# EAGLE board shematic (EAGLE 9.7.0)

Size 203.93 x 59.69 mm. Coordinates in mm from the lower left corner, seen from the top.
Outline: 0,0 203.93,0 203.93,59.69 0,59.69 0,0
Copper layers (1*16): Top 0.035mm / dielectric 1.5mm / Bottom 0.035mm
Design rules "default": minimum track width 6mil, minimum drill 0.35mm, track to track 6mil, track to pad 6mil, pad to pad 6mil, via to via 6mil, smd to smd 6mil, copper to edge 40mil, drill to drill 6mil, minimum pad ring 10mil, minimum via ring 8mil, stop-mask expansion 4mil, vias tented up to drill 0mil, thermal gap 10mil

## Footprints (pad centres in the part's own frame; a part is rotated, then mirrored left to right if it is on the bottom)
28015 = drill 1.016 long: 1 -2.54,0; 2 0,0; 3 2.54,0
SWITCH-MOMENTARY-PTH-6.5MM = drill 1.016 pad 1.88: 1 -3.251,2.261; 2 3.251,2.261; 3 -3.251,-2.261; 4 3.251,-2.261
ARDUINO-UNO-R3-SHIELD = drill 1.016 pad 1.88: 3.3V 24.13,-2.54; 5V 24.13,0; A0 24.13,12.7; A1 24.13,15.24; A2 24.13,17.78; A3 24.13,20.32; A4 24.13,22.86; A5 24.13,25.4; AREF -24.13,-13.97; D2 -24.13,20.32; D3 -24.13,17.78; D4 -24.13,15.24; D5 -24.13,12.7; D6 -24.13,10.16; D7 -24.13,7.62; D8 -24.13,3.81; D9 -24.13,1.27; D10 -24.13,-1.27; D11 -24.13,-3.81; D12 -24.13,-6.35; D13 -24.13,-8.89; GND@0 24.13,2.54; GND@1 24.13,5.08; GND@2 -24.13,-11.43; IOREF 24.13,-7.62; NC 24.13,-10.16; RES 24.13,-5.08; RX -24.13,25.4; SCL -24.13,-19.05; SDA -24.13,-16.51; TX -24.13,22.86; VIN 24.13,7.62
7SEG-X4-I2C = drill 1.016 long: P$1 -3.81,0; P$2 -1.27,0; P$3 1.27,0; P$4 3.81,0

## Placement (x,y rotation side)
PING1  DISTANCE-SENSOR-3PIN  [28015]  177.9,41.74 0 top
S1  SWITCH_MOMENTARY  [SWITCH-MOMENTARY-PTH-6.5MM]  165.2,30.31 90 top
U1  ARDUINO-UNO-R3-SHIELD  [ARDUINO-UNO-R3-SHIELD]  47.88,29.84 270 top
U2  RED  [7SEG-X4-I2C]  125.83,39.2 0 top

## Library data of the parts
PING1 S1 U1 U2 = Tinkercad

## Nets
U1_5V: PING1.2 U1.5V U2.P$1
U1_A4: U1.A4 U2.P$3
U1_A5: U1.A5 U2.P$4
U1_D2: S1.3 S1.4 U1.D2
U1_D7: PING1.3 U1.D7
U1_GND: PING1.1 S1.1 S1.2 U1.GND@0 U1.GND@1 U1.GND@2 U2.P$2

## Tracks (layer width: path | path; a pad name or v marks a point on that pad's centre or on a via)
U1_5V  (2 unrouted)
U1_A4  (1 unrouted)
U1_A5  (1 unrouted)
U1_D2  (2 unrouted)
U1_D7  (1 unrouted)
U1_GND  (6 unrouted)